# Altium PCB LightMod.PcbDoc
Units mm, origin at the board's own origin, x right, y up, seen from the top; angles counter-clockwise.
Board outline 60 x 60 mm, 2 copper layers (Top Layer, Bottom Layer), stack 1.173 mm thick; 18 components, 41 nets, 153 pads, 33 vias.
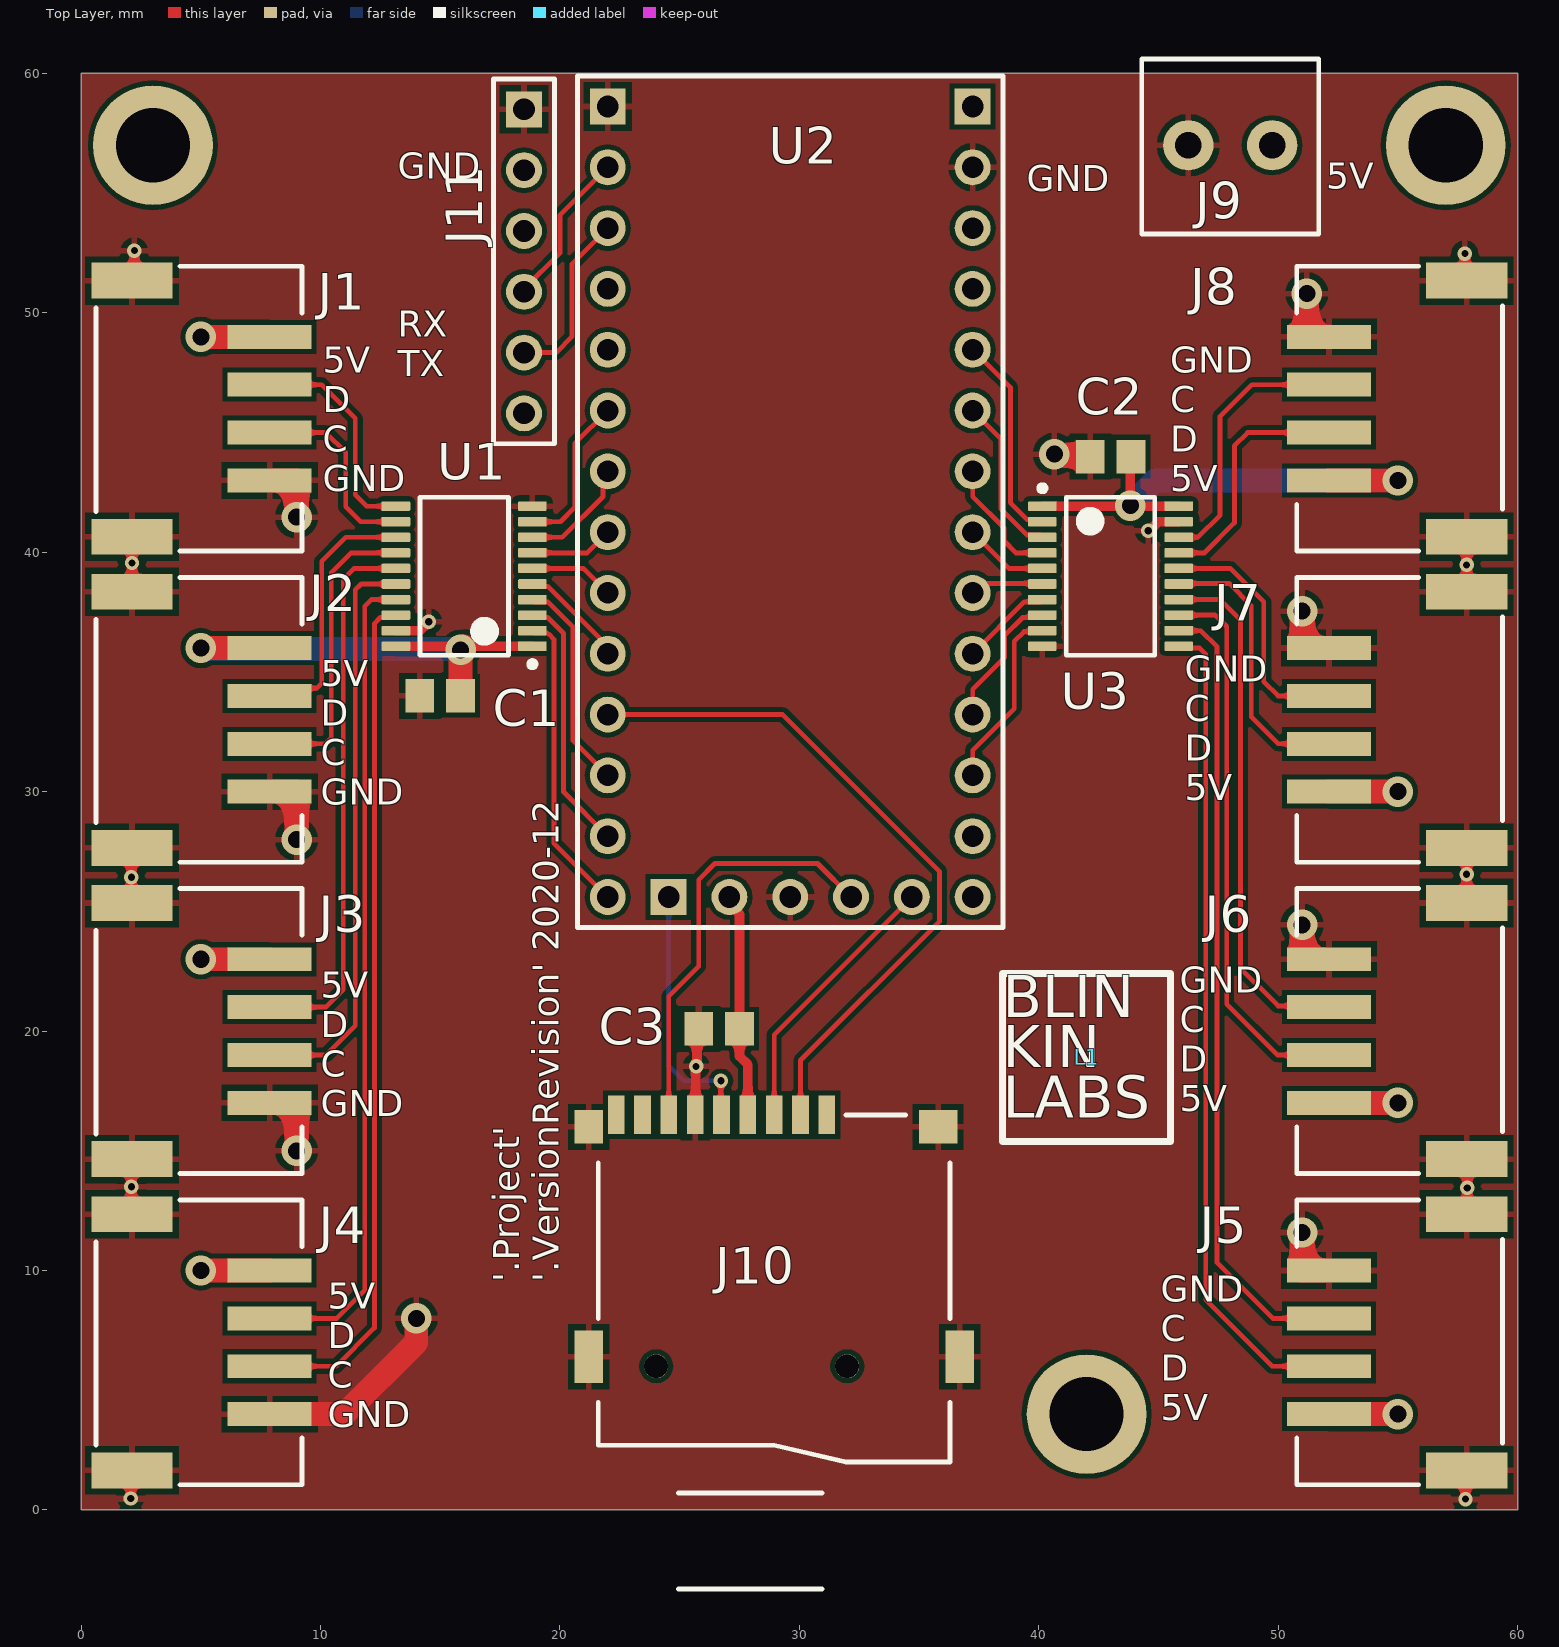
[diagram p0: Top Layer view]
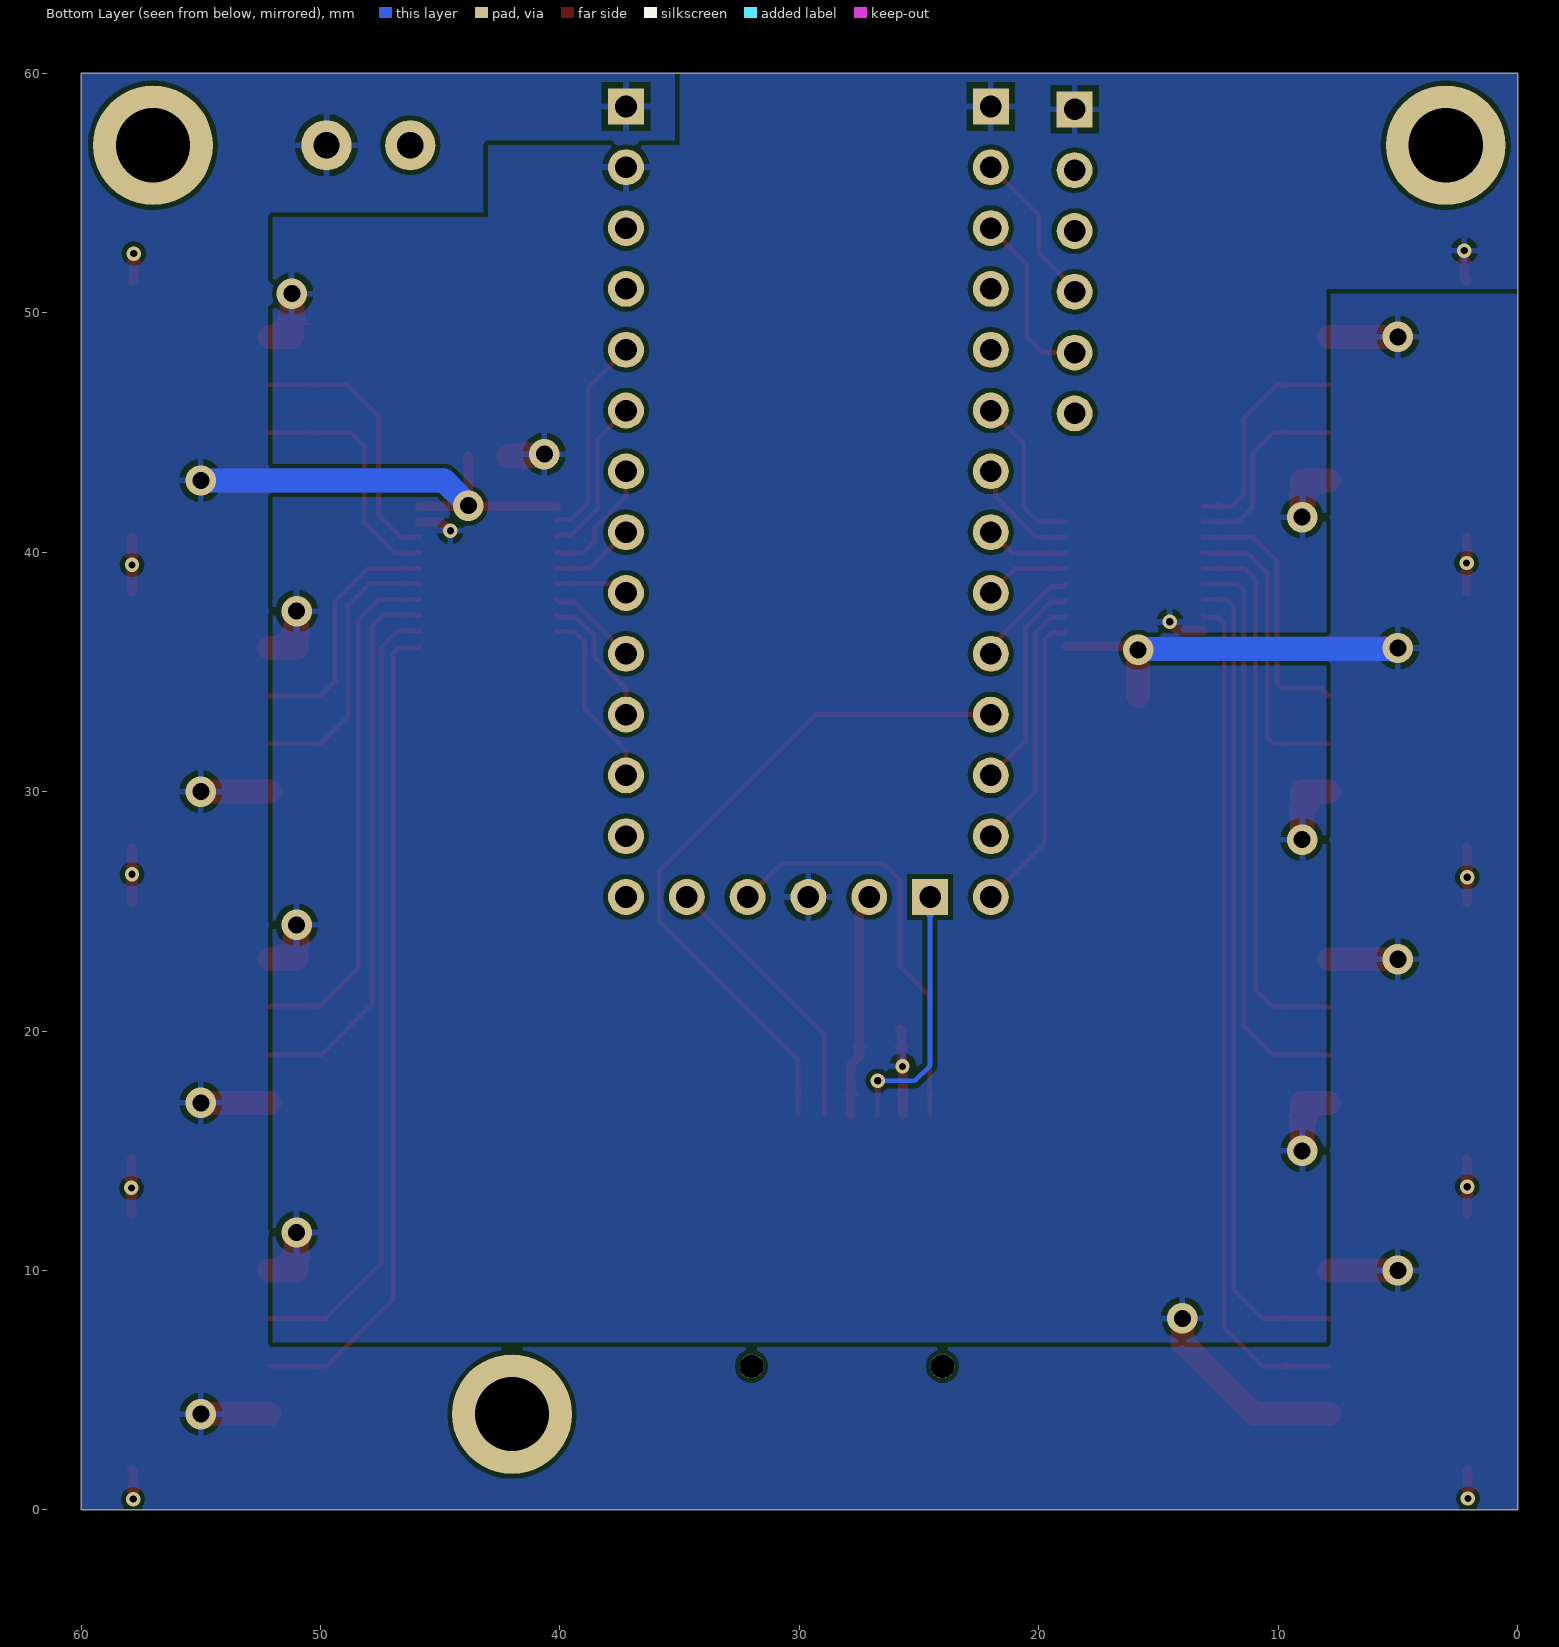
[diagram p1: Bottom Layer view, seen from below]
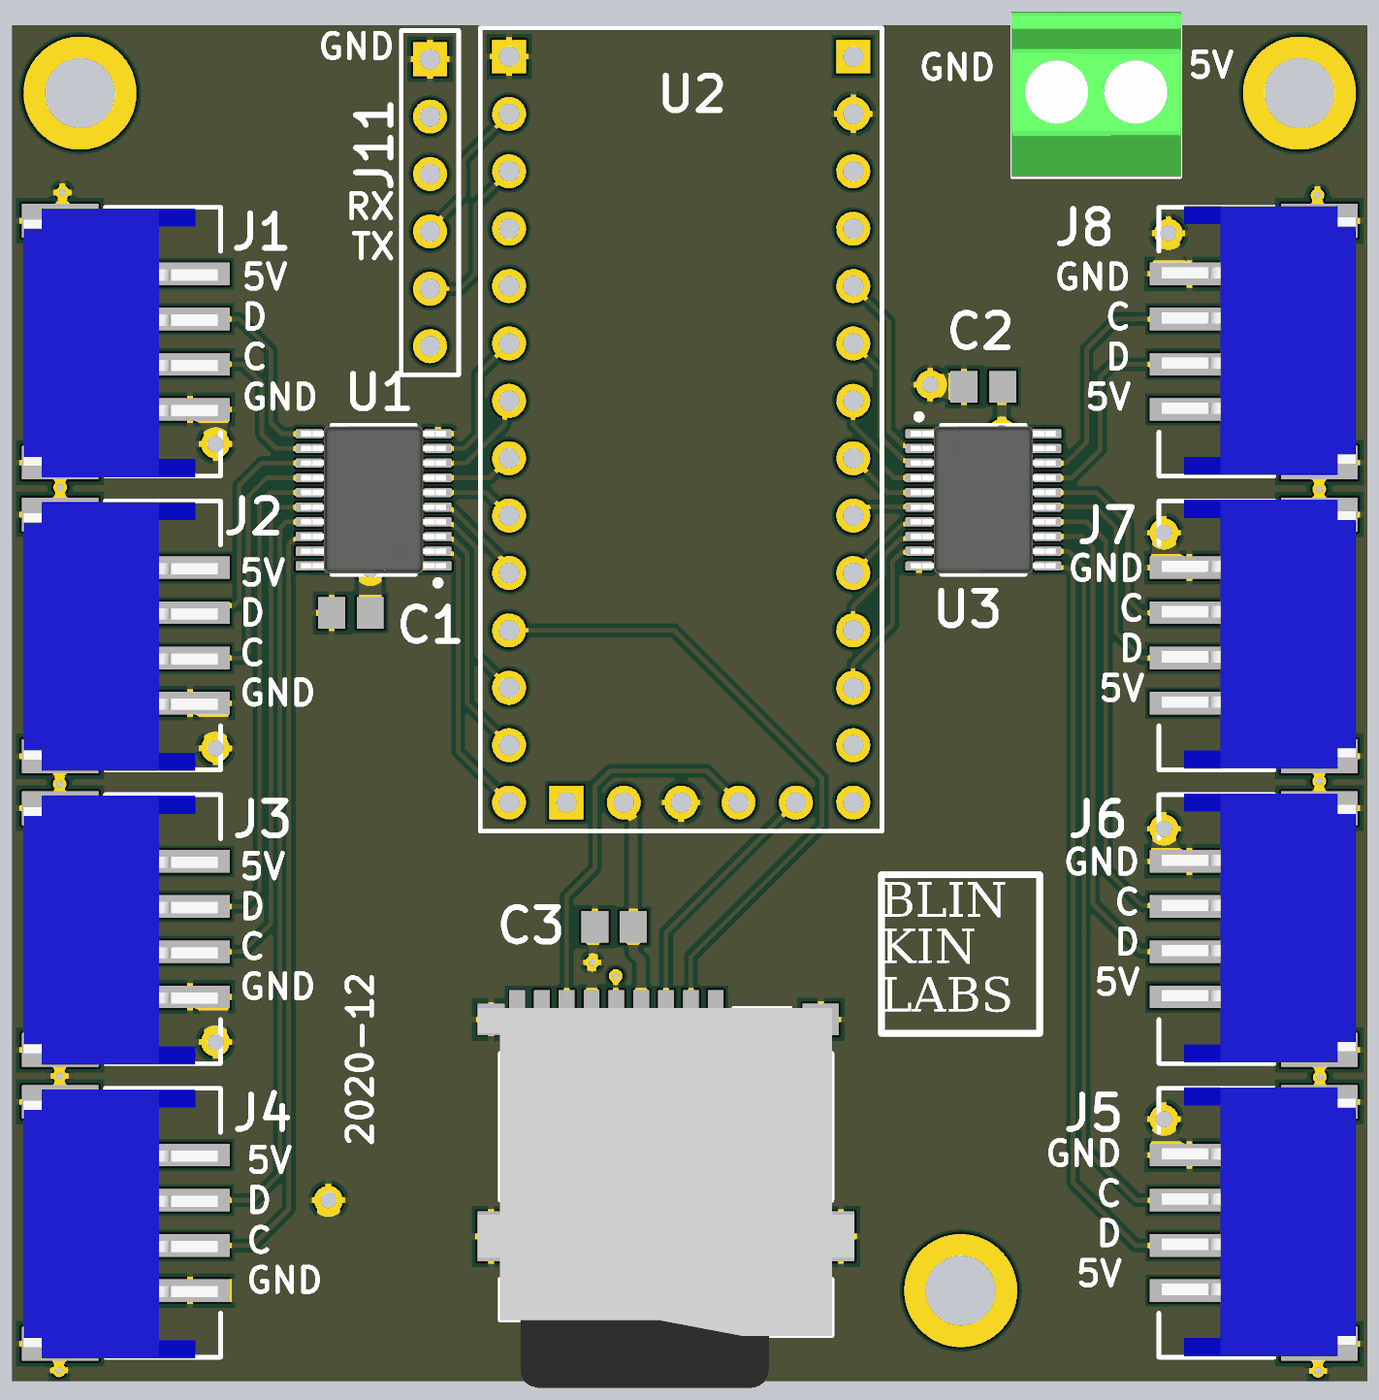
[diagram p2: 3D render of the assembled board from above, using the file's embedded part models]

## Layer stack, top to bottom
Top Solder: solder mask 0.0127, Solder Resist, Dk 3.8
Top Layer: signal copper 0.0356
Dielectric 1: dielectric 1.102, FR-4, Dk 4.8
Bottom Layer: signal copper 0.0356
Bottom Solder: solder mask 0.0127, Solder Resist, Dk 3.8

## Board outline
0,0 0,60 60,60 60,0

## Design rules (kind name [scope] priority, off if disabled: settings)
Clearance [All] p1: gap=0.2 ignorepadtopadclearanceinfootprint=FALSE
PolygonConnect [All] p1: connectstyle=Relief reliefconductorwidth=0.254 reliefentries=4 polygonreliefangle="90 Angle" airgapwidth=0.254
RoutingVias [All] p1: holewidth=0.711 width=1.27 viastyle="Through Hole" minholewidth=0.3 minwidth=0.6 maxholewidth=0.711 maxwidth=1.27
SolderMaskExpansion SolderMaskExpansion_via [IsVia] p1: expansion=-99 istentingtop=FALSE
SolderMaskExpansion [All] p2: expansion=0.102 istentingtop=FALSE
Width [All] p1: maxlimit=1 minlimit=0.2 preferedwidth=0.4
30 further rules are at their usual default settings.

## Components (designator, comment, footprint, x,y, rotation, side; value= is the part's Value field where it differs from the comment)
C1 "10uF" CAPC2012X10N 15,34 r0 top
C2 "10uF" CAPC2012X10N 43,44 r0 top
C3 "10uF" CAPC2012X10N 26.65,20.1 r0 top
J1 "S4B-PH-SM4-TB(LF)(SN)" S4B-PH-SM4-TB(LF)(SN) 5,46 r90 top
J2 "S4B-PH-SM4-TB(LF)(SN)" S4B-PH-SM4-TB(LF)(SN) 5,33 r90 top
J3 "S4B-PH-SM4-TB(LF)(SN)" S4B-PH-SM4-TB(LF)(SN) 5,20 r90 top
J4 "S4B-PH-SM4-TB(LF)(SN)" S4B-PH-SM4-TB(LF)(SN) 5,7 r90 top
J5 "S4B-PH-SM4-TB(LF)(SN)" S4B-PH-SM4-TB(LF)(SN) 55,7 r270 top
J6 "S4B-PH-SM4-TB(LF)(SN)" S4B-PH-SM4-TB(LF)(SN) 55,20 r270 top
J7 "S4B-PH-SM4-TB(LF)(SN)" S4B-PH-SM4-TB(LF)(SN) 55,33 r270 top
J8 "S4B-PH-SM4-TB(LF)(SN)" S4B-PH-SM4-TB(LF)(SN) 55,46 r270 top
J9 "1751248" 1751248 48,57 r90 top
J10 "TFP09-2-12B" TFP09-2-12B 28.95,6 r0 top
J11 "Header 6" HDR1X6 18.5,58.5 r270 top
L1 "BLINKINLABS_LOGO" BLINKINLABS_LOGO 42,18.9 r0 top
U1 "SN74HCT245PWR" PW0020A_L 16,39 r180 top
U2 "BL-EOS-BREAKOUT-REVC" BL-EOS-BREAKOUT-REVC 22,58.62 r0 top
U3 "SN74HCT245PWR" PW0020A_L 43,39 r0 top

## Footprints (in the part's own frame and the unit in brackets; to place one, negate y for a bottom-side part, rotate by r counter-clockwise, add the part's x,y. Pads: shape width x height; smd on the part's side, far side on the other; paste and mask are expansions set on the pad)
1751248 [mm] "TERM BLK 2POS SIDE ENT 3.5MM PCB"
  round 2.1 hole 1.1: 1(0,-1.75) 2(0,1.75)
  silkscreen extent -3.7,-3.7 3.6,3.7, body extent -3.7,-3.75 3.6,3.75, height 8.5
BL-EOS-BREAKOUT-REVC [mm]
  rect 1.5x1.5 hole 0.9: P1.1(0,0) P2.1(15.24,0) P3.1(2.54,-33.02)
  round 1.5 hole 0.9: P1.2(0,-2.54) P1.3(0,-5.08) P1.4(0,-7.62) P1.5(0,-10.16) P1.6(0,-12.7) P1.7(0,-15.24) P1.8(0,-17.78) P1.9(0,-20.32) P1.10(0,-22.86) P1.11(0,-25.4) P1.12(0,-27.94) P1.13(0,-30.48) P1.14(0,-33.02) P2.2(15.24,-2.54) P2.3(15.24,-5.08) P2.4(15.24,-7.62) P2.5(15.24,-10.16) P2.6(15.24,-12.7) P2.7(15.24,-15.24) P2.8(15.24,-17.78) P2.9(15.24,-20.32) P2.10(15.24,-22.86) P2.11(15.24,-25.4) P2.12(15.24,-27.94) P2.13(15.24,-30.48) P2.14(15.24,-33.02) P3.2(5.08,-33.02) P3.3(7.62,-33.02) P3.4(10.16,-33.02) P3.5(12.7,-33.02)
  silkscreen extent -1.27,-34.29 16.51,1.27
BLINKINLABS_LOGO [mm] "Square blinkinlabs logo"
  silkscreen extent -3.51,-3.51 3.5,3.5
CAPC2012X10N [mm] "Chip Capacitor, 2-Leads, Body 2.00x1.25mm, IPC Medium Density"
  rect 1.2x1.4 smd: 1(-0.85,0) 2(0.85,0)
  body extent -1.05,-0.67 1.05,0.67, height 0.95
HDR1X6 [mm] "Connector; Header; 6 Position"
  rect 1.5x1.5 hole 0.9: 1(0,0)
  round 1.5 hole 0.9: 2(2.54,0) 3(5.08,0) 4(7.62,0) 5(10.16,0) 6(12.7,0)
  silkscreen extent -1.27,-1.27 13.97,1.27
PW0020A_L [mm] "SOP, 20-Leads, Body 6.6x4.5mm, Pitch 0.65mm, IPC High Density"
  rrect25% 1.2x0.4 smd: 1(-2.85,2.925) 2(-2.85,2.275) 3(-2.85,1.625) 4(-2.85,0.975) 5(-2.85,0.325) 6(-2.85,-0.325) 7(-2.85,-0.975) 8(-2.85,-1.625) 9(-2.85,-2.275) 10(-2.85,-2.925) 11(2.85,-2.925) 12(2.85,-2.275) 13(2.85,-1.625) 14(2.85,-0.975) 15(2.85,-0.325) 16(2.85,0.325) 17(2.85,0.975) 18(2.85,1.625) 19(2.85,2.275) 20(2.85,2.925)
  silkscreen extent -2.98,-3.3 1.85,3.8, body extent -3.21,-3.25 3.21,3.25, height 1
S4B-PH-SM4-TB(LF)(SN) [mm] "CONN HEADER SMD R/A 4POS 2MM"
  rect 1x3.5 smd: 1(3,-2.875) 2(1,-2.875) 3(-1,-2.875) 4(-3,-2.875)
  rect 1.5x3.4 smd: MP1(5.35,2.875) MP2(-5.35,2.875)
  silkscreen extent -5.95,-4.22 5.95,4.38, body extent -6,-4.1 5.9,4.5, height 5.6
TFP09-2-12B [mm] "Micro SD Card Connector"
  rect 0.7x1.6 smd: 1(2.2,10.5) 2(1.1,10.5) 3(0,10.5) 4(-1.1,10.5) 5(-2.2,10.5) 6(-3.3,10.5) 7(-4.4,10.5) 8(-5.5,10.5)
  round 1 hole 1 unplated: ALIGN-1(3.05,0) ALIGN-2(-4.93,0)
  rect 0.7x1.6 smd mask+0.05: CD(-6.6,10.5)
  rect 1.6x1.4 smd: MT1(6.85,10)
  rect 1.2x2.2 smd: MT2(7.75,0.4) MT3(-7.75,0.4)
  rect 1.2x1.4 smd mask+0.05: MT4(-7.75,10)
  silkscreen extent -7.35,-9.3 7.35,10.5, body extent -8.35,-6.3 8.35,10.5, height 1.8

## Part data
C1 C2 C3: library part GRM21BR61C106ME15L, "CAP CER 10UF 16V X5R 0805", Case/Package=0805, Digi-Key Part Number=490-6474-1-ND, Manufacturer="Murata Electronics North America", Operating Temperature="-55°C ~ 85°C", Package / Case="0805 (2012 Metric)", Temperature Coefficient=X5R, Tolerance=±20%, Voltage=16V, Applications="General Purpose", Datasheets=http://www.murata.com/~/media/webrenewal/support/library/catalog/products/capacitor/mlcc/c02e.pdf, Features=-, Image=//media.digikey.com/Renders/Murata%20Renders/0805%20(2012%20Metric)%20.85mm.jpg, Mounting Type="Surface Mount, MLCC", Part Status=Active, PartNumber=GRM21BR61C106ME15L, Series=GRM
J1 J2 J3 J4 J5 J6 J7 J8: "CONN HEADER SMD R/A 4POS 2MM", Manufacturer=JST, PartNumber=S4B-PH-SM4-TB(LF)(SN)
J9: "TERM BLK 2POS SIDE ENT 3.5MM PCB", Manufacturer="Phoenix Contact", PartNumber=1751248
J10: "Micro SD Card Connector", Manufacturer=Unknown/Generic, PartNumber=TFP09-2-12B
J11: "Header, 6-Pin", LatestRevisionDate=17-Jul-2002, LatestRevisionNote="Re-released for DXP Platform.", Publisher="Altium Limited"
L1: "Square logo"
U1 U3: library part CMP-1620-00542-2, "Octal Bus Transceivers With 3-State Outputs, PW0020A, LARGE T&R", F @ Nom Voltage(Max)(Mhz)=25, Generic Part Number=SN74HCT245, ICC @ Nom Voltage(Max)(mA)=0.08, Manufacturer="Texas Instruments", Operating Temperature Range(C)="-40 to 85", Rating=Catalog, Voltage(Nom)(V)=5, Bits(#)=8, Code_JEDEC=MO-153, DatasheetVersion=SCLS020E, Input Type=TTL, Output Drive (IOL/IOH)(Max)(mA)=-6/6, Output Type=CMOS, PackageReference=PW0020A, Schmitt Trigger=No, Technology Family=HCT, tpd @ Nom Voltage(Max)(ns)=25, VCC(Max)(V)=5.5, VCC(Min)(V)=4.5
U2: Manufacturer=Blinkinlabs, PartNumber=QL-EOS-S3-Breakout

## Free pads (board coordinates)
  round 5 hole 3.1 unplated: MNT1(57,57) MNT2(3,57) MNT3(42,4)

## Via types
v1: diameter 1.27, hole 0.711, Top Layer to Bottom Layer, 19 vias
v2: diameter 0.6, hole 0.3, Top Layer to Bottom Layer, 14 vias

## Nets (pads, with @x,y where several pads share a name; then routed paths per layer and width w, separated by ;. In a path a pad name is that pad's centre, name@x,y a point inside that pad or via, vN(x,y) a via of type N, cw(c..) or ccw(c..) an arc to the next point about the centre after c; other vN are vias at no path point)
3.3V: C3.2 J10.4 U2.P3.2 | length 9.4
  Top Layer w0.4: U2.P3.2 27.08,25.302 27.5,24.882 C3.2 27.5,18.95 27.85,18.6 J10.4
5V: C1.2 C2.2 J1.1 J2.1 J3.1 J4.1 J5.1 J6.1 J7.1 J8.1 J9.1 U1.1 U1.20 U2.P2.1 U3.1 U3.20 | length 61.1
  Top Layer w0.4: U1.20 16,36.075 U1.1 ; U3.1 43.8,41.925 v1(43.825,41.95) ; C2.2 43.825,43.975 v1(43.825,41.95) ; U3.20 43.85,41.925 v1(43.825,41.95)
  Top Layer w1: v1(5,10) J4.1 ; v1(5,23) J3.1 ; v1(5,36) J2.1 ; v1(5,49) J1.1 ; C1.2 v1(15.85,35.925) v1@16,36.075 ; J5.1 v1(55,4) ; J6.1 v1(55,17) ; J7.1 v1(55,30) ; J8.1 v1(55,43)
  Bottom Layer w1: v1(5,36) 5.038,35.962 15.812,35.962 v1(15.85,35.925) ; v1(43.825,41.95) 43.825,41.975 44.85,43 v1(55,43)
C_1: U1.8 U2.P1.7 | length 4.8
  Top Layer w0.2: U1.8 20.1,40.625 21.805,42.33 21.805,43.185 U2.P1.7
C_2: U1.6 U2.P1.9 | length 3.6
  Top Layer w0.2: U1.6 20.975,39.325 U2.P1.9
C_3: U1.4 U2.P1.12 | length 9
  Top Layer w0.2: U1.4 18.95,37.925 19.5,37.925 20.55,36.875 20.55,32.13 U2.P1.12
C_4: U1.2 U2.P1.14 | length 12.7
  Top Layer w0.2: U1.2 18.95,36.625 19.475,36.625 19.525,36.575 19.545,36.575 19.75,36.37 19.75,27.85 U2.P1.14
C_5: U2.P2.11 U3.8 | length 5.8
  Top Layer w0.2: U2.P2.11 37.24,34.275 38.575,35.61 38.575,36.525 39.325,37.275 40.05,37.275 U3.8
C_6: U2.P2.9 U3.6 | length 3.1
  Top Layer w0.2: U2.P2.9 37.425,38.3 37.825,38.7 40.125,38.7 U3.6
C_7: U2.P2.7 U3.4 | length 5.3
  Top Layer w0.2: U2.P2.7 37.24,42.325 38.55,41.015 38.55,40.475 39.05,39.975 U3.4
C_8: U2.P2.5 U3.2 | length 8.7
  Top Layer w0.2: U2.P2.5 38.815,46.885 38.815,42.065 39.505,41.375 40.05,41.375 U3.2
C_OUT_1: J1.3 U1.12 | length 8.2
  Top Layer w0.2: J1.3 10.225,45 11.05,44.175 11.05,41.9 11.675,41.275 U1.12
C_OUT_2: J2.3 U1.14 | length 12.6
  Top Layer w0.2: J2.3 10.2,32 10.45,32.25 10.45,39.15 11.275,39.975 U1.14
C_OUT_3: J3.3 U1.16 | length 24.1
  Top Layer w0.2: J3.3 10.225,19 11.45,20.225 11.45,38.425 11.7,38.675 U1.16
C_OUT_4: J4.3 U1.18 | length 35.5
  Top Layer w0.2: J4.3 10.65,6 12.25,7.6 12.25,37.02 12.505,37.275 13.05,37.275 U1.18
C_OUT_5: J5.3 U3.12 | length 33.2
  Top Layer w0.2: U3.12 46.775,36.725 47.45,36.05 47.45,10.325 49.775,8 J5.3
C_OUT_6: J6.3 U3.14 | length 21.9
  Top Layer w0.2: U3.14 47.575,38.025 48.425,37.175 48.425,22.625 50,21.05 52.075,21.05 J6.3
C_OUT_7: J7.3 U3.16 | length 10.4
  Top Layer w0.2: U3.16 48,39.325 49.4,37.925 49.4,34.6 50,34 J7.3
C_OUT_8: J8.3 U3.18 | length 11.3
  Top Layer w0.2: U3.18 46.65,40.625 47.575,41.55 47.575,45.675 48.9,47 J8.3
D_1: U1.9 U2.P1.6 | length 6.6
  Top Layer w0.2: U1.9 20.025,41.275 20.625,41.875 20.625,44.545 U2.P1.6
D_2: U1.7 U2.P1.8 | length 3.5
  Top Layer w0.2: U1.7 21.135,39.975 U2.P1.8
D_3: U1.5 U2.P1.10 | length 4.5
  Top Layer w0.2: U1.5 18.95,38.575 19.495,38.575 22,36.07 U2.P1.10
D_4: U1.3 U2.P1.13 | length 10.9
  Top Layer w0.2: U1.3 18.95,37.275 19.495,37.275 20.15,36.62 20.15,29.99 U2.P1.13
D_5: U2.P2.12 U3.9 | length 7.7
  Top Layer w0.2: U2.P2.12 37.24,31.735 38.975,33.47 38.975,36.275 39.39,36.69 40.115,36.69 U3.9
D_6: U2.P2.10 U3.7 | length 3.8
  Top Layer w0.2: U2.P2.10 39.405,37.925 40.05,37.925 U3.7
D_7: U2.P2.8 U3.5 | length 3.5
  Top Layer w0.2: U2.P2.8 38.755,39.325 U3.5
D_8: U2.P2.6 U3.3 | length 6.8
  Top Layer w0.2: U2.P2.6 38.415,44.745 38.415,41.815 39.505,40.725 40.05,40.725 U3.3
D_OUT_1: J1.2 U1.11 | length 9.3
  Top Layer w0.2: J1.2 10.05,47 11.45,45.6 11.45,42.4 11.925,41.925 U1.11
D_OUT_2: J2.2 U1.13 | length 11
  Top Layer w0.2: J2.2 8.2,34.325 9.85,34.325 10.05,34.525 10.05,39.625 11.05,40.625 U1.13
D_OUT_3: J3.2 U1.15 | length 22.9
  Top Layer w0.2: J3.2 10.225,21 10.95,21.725 10.95,38.875 11.4,39.325 U1.15
D_OUT_4: J4.2 U1.17 | length 34.5
  Top Layer w0.2: J4.2 10.675,8 11.85,9.175 11.85,37.75 12.125,38.025 U1.17
D_OUT_5: J5.2 U3.11 | length 34.5
  Top Layer w0.2: U3.11 45.925,36 46.725,36 46.975,35.75 46.975,8.775 49.75,6 J5.2
D_OUT_6: J6.2 U3.13 | length 23.1
  Top Layer w0.2: U3.13 47.375,37.375 47.85,36.9 47.85,21.125 49.975,19 J6.2
D_OUT_7: J7.2 U3.15 | length 11.8
  Top Layer w0.2: U3.15 45.875,38.7 47.95,38.7 48.875,37.775 48.875,33.125 50,32 J7.2
D_OUT_8: J8.2 U3.17 | length 10.2
  Top Layer w0.2: U3.17 46.925,39.975 48.175,41.225 48.175,44.45 48.725,45 J8.2
GND: C1.1 C2.1 C3.1 J1.4 J1.MP1 J1.MP2 J2.4 J2.MP1 J2.MP2 J3.4 J3.MP1 J3.MP2 J4.4 J4.MP1 J4.MP2 J5.4 J5.MP1 J5.MP2 J6.4 J6.MP1 J6.MP2 J7.4 J7.MP1 J7.MP2 J8.4 J8.MP1 J8.MP2 J9.2 J10.6 J10.MT1 J10.MT2 J10.MT3 J10.MT4 J11.1 U1.10 U1.19 U2.P1.1 U2.P2.2 U2.P3.3 U3.10 U3.19 | length 54.8
  Top Layer w0.4: v2(2.075,0.475) 2.075,1.6 J4.MP2 ; J4.MP1 2.1,12.375 v2(2.1,13.5) 2.1,14.625 J3.MP2 ; J3.MP1 2.1,25.375 v2(2.1,26.425) 2.1,27.625 J2.MP2 ; J2.MP1 v2(2.125,39.55) J1.MP2 ; J1.MP1 2.225,51.45 v2(2.225,52.6) ; U1.19 14.15,36.725 v2(14.525,37.1) ; J10.6 25.669,16.519 25.669,18.494 v2@25.688,18.513 ; v2(25.688,18.525) v2@25.688,18.513 ; C3.1 25.725,20.025 25.725,18.55 v2@25.688,18.513 ; v2(44.575,40.9) 44.629,40.9 45.004,41.275 U3.19 ; v2(57.8,52.475) 57.8,51.425 J8.MP2 ; v2(57.825,0.45) 57.825,1.6 J5.MP1 ; J5.MP2 57.9,12.375 v2(57.9,13.45) 57.9,14.625 J6.MP1 ; J6.MP2 v2(57.875,26.55) J7.MP1 ; J7.MP2 v2(57.875,39.475) J8.MP1
  Top Layer w1: J4.4 11,4 14,7 v1(14,8) ; J3.4 9,17 v1(9,15) ; J2.4 9,30 v1(9,28) ; J1.4 9,43 v1(9,41.467) ; v1(40.65,44.1) 40.7,44.05 42.1,44.05 C2.1 ; v1(51,11.588) 51,10 J5.4 ; v1(51,24.438) 51,23 J6.4 ; v1(51,37.537) 51,36 J7.4 ; v1(51.2,50.8) 51.2,49 J8.4
RX: J11.4 U2.P1.2 | length 6.6
  Top Layer w0.2: J11.4 18.5,51 20,52.5 20,54.08 U2.P1.2
SPI_CLK: J10.5 U2.P3.1 | length 10.9
  Top Layer w0.2: v2(26.725,17.925) 26.725,16.525 J10.5
  Bottom Layer w0.2: U2.P3.1 24.54,18.56 25.175,17.925 v2(26.725,17.925)
SPI_MISO: J10.3 U2.P3.5 | length 11.5
  Top Layer w0.2: J10.3 28.95,19.85 U2.P3.5
SPI_MOSI: J10.7 U2.P3.4 | length 17.6
  Top Layer w0.2: J10.7 24.55,21.45 25.8,22.7 25.8,26.325 26.475,27 30.76,27 U2.P3.4
SPI_SS2: J10.2 U2.P1.11 | length 29.1
  Top Layer w0.2: U2.P1.11 29.305,33.22 35.85,26.675 35.85,24.575 30.05,18.775 J10.2
TX: J11.5 U2.P1.3 | length 7.4
  Top Layer w0.2: J11.5 19.84,48.34 20.5,49 20.5,52.04 U2.P1.3
pads on no net: J10.1 J10.8 J10.ALIGN-1 J10.ALIGN-2 J10.CD J11.2 J11.3 J11.6 U2.P1.4 U2.P1.5 U2.P2.3 U2.P2.4 U2.P2.13 U2.P2.14

## Polygon pours and split planes (outlines as drawn)
5V on Bottom Layer "NONET_L02_P-001" (solid, pour order 2): 0,60 60,60 60,0 0,0
GND on Bottom Layer "NONET_L02_P-001" (solid, pour order 0): 0,60 35,60 35,57 43,57 43,54 52,54 52,7 8,7 8,51 0,51
GND on Top Layer "NONET_L02_P-001" (solid, pour order 1): 0,0 60,0 60,60 0,60

## Silkscreen, mask and mechanical layers (free items; w line width, h text height)
Top Overlay:
  text "5V" at 52,55.175 h1.1
  text "GND" at 39.5,55.075 h1.1
  text "GND /  /  /  / RX / TX" at 13.236,47.351 h1.1
  text "5V / D / C / GND" at 10.1,42.551 h1.1
  text "GND / C / D / 5V" at 45.5,42.551 h1.1
  text "GND / C / D / 5V" at 46.1,29.651 h1.1
  text "5V / D / C / GND" at 10,29.451 h1.1
  text "GND / C / D / 5V" at 45.9,16.651 h1.1
  text "5V / D / C / GND" at 10,16.451 h1.1
  text "'.Project' / '.VersionRevision' 2020-12" at 19.949,9.5 h1.1 r90
  text "GND / C / D / 5V" at 45.1,3.751 h1.1
  text "5V / D / C / GND" at 10.3,3.451 h1.1
Mechanical 1:
  the board outline again, w0.1
Dimensions:
  lines w0.381: -8.31,-32.912 2.102,-32.912 25.718,-32.912 47.556,-32.912 64.062,-32.912 78.536,-32.912 ; -8.31,-29.864 2.102,-29.864 25.718,-29.864 47.556,-29.864 64.062,-29.864 78.536,-29.864 ; -8.31,-26.816 2.102,-26.816 25.718,-26.816 47.556,-26.816 64.062,-26.816 78.536,-26.816 ; -8.31,-23.768 2.102,-23.768 25.718,-23.768 47.556,-23.768 64.062,-23.768 78.536,-23.768 ; -8.31,-20.72 2.102,-20.72 25.718,-20.72 47.556,-20.72 64.062,-20.72 78.536,-20.72 ; -8.31,-17.672 2.102,-17.672 25.718,-17.672 47.556,-17.672 64.062,-17.672 78.536,-17.672 ; -8.31,-14.624 78.536,-14.624 ; 2.102,-11.576 2.102,-35.96 ; 25.718,-11.576 25.718,-35.96 ; 47.556,-11.576 47.556,-35.96 ; 64.062,-11.576 64.062,-35.96 ; 2.102,-35.96 25.718,-35.96 ; 2.102,-35.96 -8.31,-35.96 -8.31,-11.576 78.536,-11.576 78.536,-35.96 64.062,-35.96 ; 25.718,-35.96 47.556,-35.96 ; 47.556,-35.96 64.062,-35.96
  text "Layer" at -6.532,-13.862 h1.52
  text "Name" at 3.88,-13.862 h1.52
  text "Material" at 27.496,-13.862 h1.52
  text "Thickness" at 49.334,-13.862 h1.52
  text "Constant" at 65.84,-13.862 h1.52
  text "Top Overlay" at 3.88,-16.91 h1.52
  text "Top Solder" at 3.88,-19.958 h1.52
  text "Solder Resist" at 27.496,-19.958 h1.52
  text "0.013mm" at 49.334,-19.958 h1.52
  text "3.8" at 65.84,-19.958 h1.52
  text "1" at -6.532,-23.006 h1.52
  text "Top Layer" at 3.88,-23.006 h1.52
  text "Copper" at 27.496,-23.006 h1.52
  text "0.036mm" at 49.334,-23.006 h1.52
  text "Dielectric 1" at 3.88,-26.054 h1.52
  text "FR-4" at 27.496,-26.054 h1.52
  text "1.102mm" at 49.334,-26.054 h1.52
  text "4.8" at 65.84,-26.054 h1.52
  text "2" at -6.532,-29.102 h1.52
  text "Bottom Layer" at 3.88,-29.102 h1.52
  text "Copper" at 27.496,-29.102 h1.52
  text "0.036mm" at 49.334,-29.102 h1.52
  text "Bottom Solder" at 3.88,-32.15 h1.52
  text "Solder Resist" at 27.496,-32.15 h1.52
  text "0.013mm" at 49.334,-32.15 h1.52
  text "3.8" at 65.84,-32.15 h1.52
  text "Bottom Overlay" at 3.88,-35.198 h1.52
  text "Total board thickness:" at -6.532,-38.246 h1.52
  text "1.199mm" at 49.334,-38.246 h1.52

## Dimensions
0,0 to 0,60 on Dimensions
0,0 to 60,0 on Dimensions

## Text inside footprints (layer, text, board x,y; h text height)
L1: Top Overlay "KIN" at 38.5,17.9 h3; Top Overlay "LABS" at 38.5,15.8 h3; Top Overlay "BLIN" at 38.5,20 h3